# Altium PCB BCM_ECU_revA.PcbDoc (part 1 of 4)
Units mm, origin at the board's own origin, x right, y up, seen from the top; angles counter-clockwise.
Board outline 224 x 100 mm, 4 copper layers (TOP SIG, GND, PWR, BOT SIG), stack 0.603 mm thick; 389 components, 400 nets, 1315 pads, 143 vias.
Unrouted connection lines stored in the file: 689.
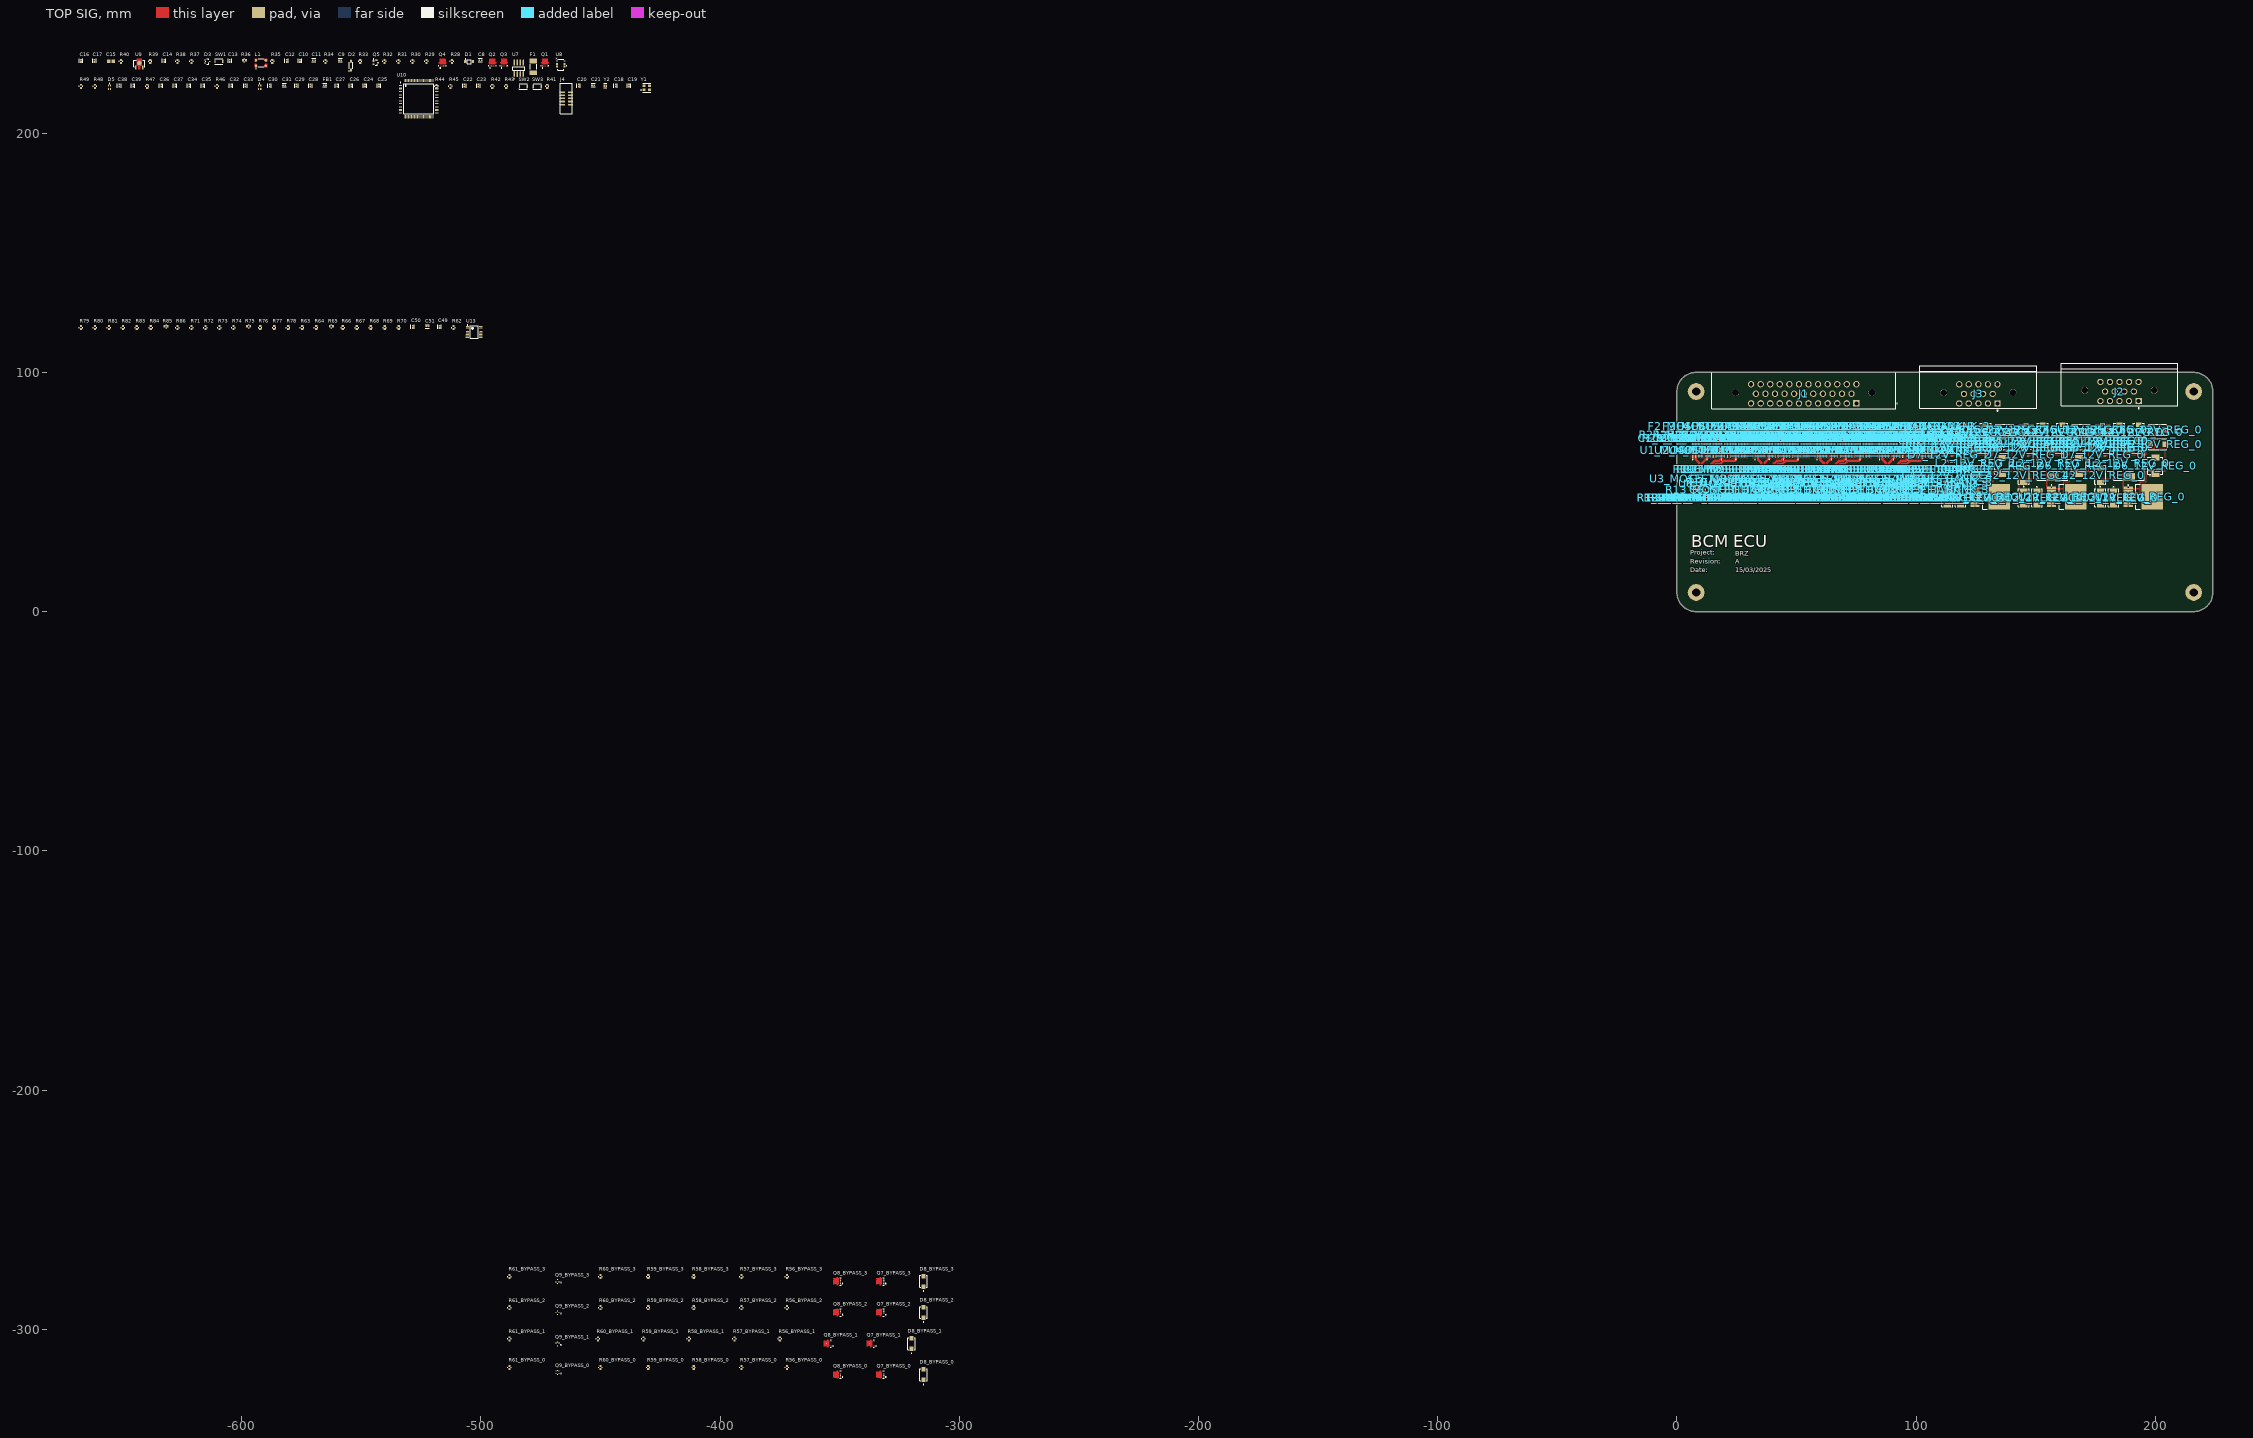
[diagram p0: TOP SIG view]
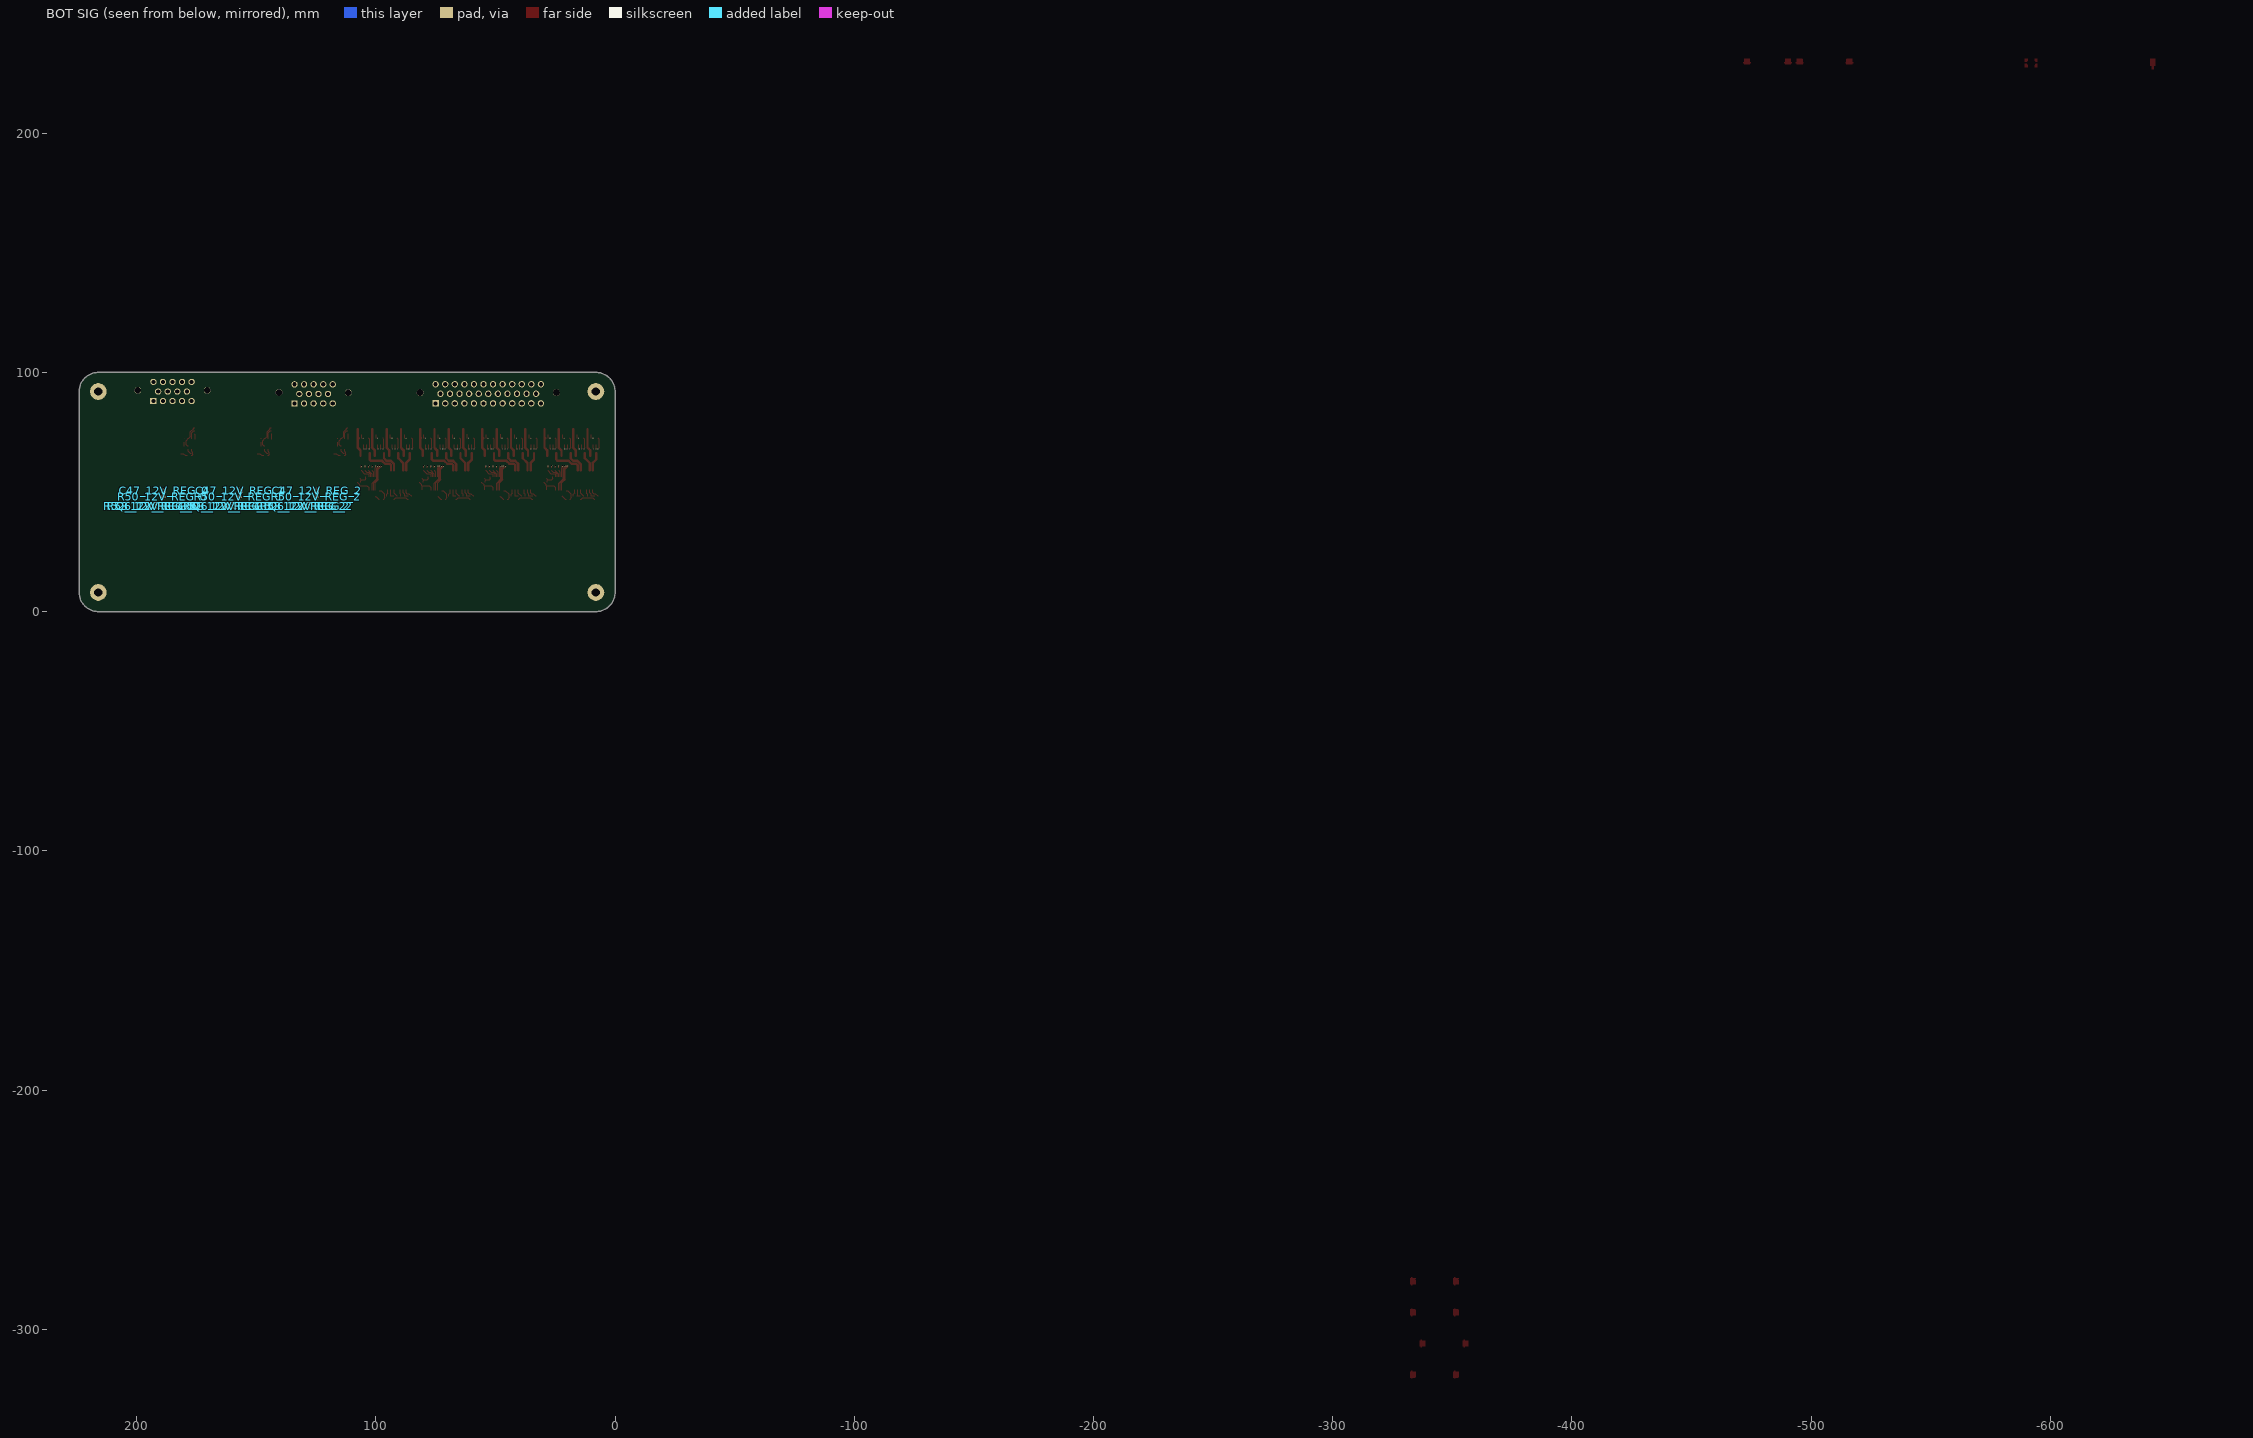
[diagram p1: BOT SIG view, seen from below]

## Layer stack, top to bottom
Top Solder: solder mask 0.0102, Solder Resist, Dk 3.5
TOP SIG: signal copper 0.0356
Dielectric 2: prepreg 0.0711, PP-006, Dk 4.1
GND: signal copper 0.035
Dielectric 1: dielectric 0.32, FR-4, Dk 4.8
PWR: signal copper 0.035
Dielectric 3: prepreg 0.0711, PP-006, Dk 4.1
BOT SIG: signal copper 0.0356
Bottom Solder: solder mask 0.0102, Solder Resist, Dk 3.5

## Board outline
0,8 ccw(c8,8) 8,0 216,0 ccw(c216,8) 224,8 224,92 ccw(c216,92) 216,100 8,100 ccw(c8,92) 0,92

## Design rules (kind name [scope] priority, off if disabled: settings)
BoardOutlineClearance [All] p1: gap=0.2 ignorepadtopadclearanceinfootprint=FALSE
Clearance [All] p1: gap=0.102 ignorepadtopadclearanceinfootprint=FALSE except(0.127: Arc-Via Track-Via SMDPad-Via THPad-Via Via-Via Via-Fill Via-Poly Via-Region Via-Text; 0.25: Arc-Hole Track-Hole SMDPad-Hole THPad-Hole Via-Hole Fill-Hole Poly-Hole Region-Hole Text-Hole)
ComponentClearance [All] p1: gap=0.102 collisioncheckmode=3 verticalgap=0.102 showdistances=TRUE
DiffPairsRouting [All] p1: maxlimit=0.102 minlimit=0.102 mostfreqgap=0.102 toplayer_minwidth=0.102 toplayer_maxwidth=1816.048 toplayer_prefwidth=0.102 midlayer1_minwidth=0.102 midlayer1_maxwidth=1816.048 midlayer1_prefwidth=0.102 midlayer2_minwidth=0.102 midlayer2_maxwidth=1816.048 midlayer2_prefwidth=0.102 bottomlayer_minwidth=0.102 bottomlayer_maxwidth=1816.048 bottomlayer_prefwidth=0.102 maxuncoupledlength=12.7
Height [All] p1: minheight=0 maxheight=1816.048 prefheight=12.7
HoleSize [All] p1: absolutevalues=TRUE maxlimit=6.3 minlimit=0.2 maxpercent=80.000 minpercent=20.000
HoleToHoleClearance [All] p1: gap=0.25 allowstackedmicrovias=FALSE
MinimumAnnularRing [All] p1: minimumring=0.076
MinimumSolderMaskSliver [All] p1: minsoldermaskwidth=0
PlaneClearance [All] p1: clearance=0.102
PlaneConnect PlaneConnectPowerPads [InPadClass('PowerPads')] p1: planeconnectstyle=Direct reliefexpansion=0.508 reliefentries=4 reliefconductorwidth=0.254 reliefairgap=0.254
PlaneConnect [All] p2: pad.planeconnectstyle=Relief pad.reliefexpansion=0.3 pad.reliefentries=4 pad.reliefconductorwidth=0.102 pad.reliefairgap=0.102 via.planeconnectstyle=Direct via.reliefexpansion=0.3 via.reliefentries=4 via.reliefconductorwidth=0.127 via.reliefairgap=0.127
PolygonConnect PolygonConnectPowerPads [All vs (InPadClass('PowerPads'))] p1: connectstyle=Direct reliefconductorwidth=0.254 reliefentries=4 polygonreliefangle="90 Angle" airgapwidth=0.254
PolygonConnect [All] p2: thpad.connectstyle=Relief thpad.reliefconductorwidth=0.102 thpad.reliefentries=4 thpad.polygonreliefangle="90 Angle" thpad.airgapwidth=0.102 smdpad.connectstyle=Relief smdpad.reliefconductorwidth=0.102 smdpad.reliefentries=4 smdpad.polygonreliefangle="90 Angle" smdpad.airgapwidth=0.102 via.connectstyle=Direct via.reliefconductorwidth=0.127 via.reliefentries=4 via.polygonreliefangle="90 Angle" via.airgapwidth=0.127
RoomDefinition 12V_REG_1 [InComponentClass('12V_REG_1')] p1: confinementstyle=ConfineIn formatcopy=TRUE lockcomponents=FALSE outline 174,80 142,80 142,42 174,42
RoomDefinition 12V_REG_2 [InComponentClass('12V_REG_2')] p2: confinementstyle=ConfineIn formatcopy=TRUE lockcomponents=FALSE outline 142,80 110,80 110,42 142,42
RoomDefinition MOSFET_BANK_3 [InComponentClass('MOSFET_BANK_3')] p3: confinementstyle=ConfineIn formatcopy=TRUE lockcomponents=FALSE outline 83,46 109,46 109,80 83,80
RoomDefinition MOSFET_BANK_2 [InComponentClass('MOSFET_BANK_2')] p4: confinementstyle=ConfineIn formatcopy=TRUE lockcomponents=FALSE outline 57,46 83,46 83,80 57,80
RoomDefinition MOSFET_BANK_1 [InComponentClass('MOSFET_BANK_1')] p5: confinementstyle=ConfineIn formatcopy=TRUE lockcomponents=FALSE outline 31,46 57,46 57,80 31,80
RoomDefinition MOSFET_BANK_0 [InComponentClass('MOSFET_BANK_0')] p6: confinementstyle=ConfineIn formatcopy=TRUE lockcomponents=FALSE outline 5,46 31,46 31,80 5,80
RoomDefinition BYPASS_3 [InComponentClass('BYPASS_3')] p7: confinementstyle=ConfineIn formatcopy=TRUE lockcomponents=FALSE outline -581,-327 -553,-327 -553,-312 -581,-312
RoomDefinition BYPASS_2 [InComponentClass('BYPASS_2')] p8: confinementstyle=ConfineIn formatcopy=TRUE lockcomponents=FALSE outline -668,-304 -648,-304 -648,-284 -668,-284
RoomDefinition BYPASS_1 [InComponentClass('BYPASS_1')] p9: confinementstyle=ConfineIn formatcopy=TRUE lockcomponents=FALSE outline -656,-321 -623,-321 -623,-310 -656,-310
RoomDefinition BYPASS_0 [InComponentClass('BYPASS_0')] p10: confinementstyle=ConfineIn formatcopy=TRUE lockcomponents=FALSE outline -605,-336 -591,-336 -591,-327 -605,-327
RoomDefinition 12V_REG_0 [InComponentClass('12V_REG_0')] p11: confinementstyle=ConfineIn formatcopy=TRUE lockcomponents=FALSE outline 206,80 174,80 174,42 206,42
RoutingVias [All] p1: holewidth=0.2 width=0.45 viastyle="Through Hole" minholewidth=0.2 minwidth=0.45 maxholewidth=6.3 maxwidth=6.55
SilkToSilkClearance [All] p1: silktosilkclearance=0
SilkToSolderMaskClearance [IsPad] p1: minsilkscreentomaskgap=0.102 clearancetoexposedcopper=TRUE
SolderMaskExpansion [All] p1: expansion=0.075 istentingtop=FALSE
Width [All] p1: maxlimit=1816.048 minlimit=0.102 preferedwidth=0.102
20 further rules are at their usual default settings.

## Classes and differential pairs
component class 12V_REG_2: C40_12V_REG_2 C41_12V_REG_2 C42_12V_REG_2 C43_12V_REG_2 C44_12V_REG_2 C45_12V_REG_2 C46_12V_REG_2 C47_12V_REG_2 C48_12V_REG_2 D6_12V_REG_2 D7_12V_REG_2 L2_12V_REG_2 Q6_12V_REG_2 R5_12V_REG_2 R7_12V_REG_2 R50_12V_REG_2 R51_12V_REG_2 R52_12V_REG_2 R53_12V_REG_2 R54_12V_REG_2 R55_12V_REG_2 R87_12V_REG_2 U11_12V_REG_2 U12_12V_REG_2
channel class MOSFET_BANK: MOSFET_BANK_0 MOSFET_BANK_1 MOSFET_BANK_2 MOSFET_BANK_3
channel class BYPASS_BLOCK: BYPASS_0 BYPASS_1 BYPASS_2 BYPASS_3
channel class 12V_REG: 12V_REG_0 12V_REG_1 12V_REG_2
net class 120DIFF: CAN_N CAN_P PRE_CAN_N PRE_CAN_P TERM_CAP
component class PWR_MGMT: C8 C9 C10 C11 C12 C13 C14 C15 C16 C17 D1 D2 D3 F1 L1 Q1 Q2 Q3 Q4 Q5 Q6 Q7 R28 R29 R30 R31 R32 R33 R34 R35 R36 R37 R38 R39 R40 SW1 U7 U8 U9
component class MOSFET_BANK_3: C1_MOSFET_BANK_3 C2_MOSFET_BANK_3 C3_MOSFET_BANK_3 C4_MOSFET_BANK_3 C5_MOSFET_BANK_3 C6_MOSFET_BANK_3 C7_MOSFET_BANK_3 F2_MOSFET_BANK_3 F3_MOSFET_BANK_3 F4_MOSFET_BANK_3 F5_MOSFET_BANK_3 R1_MOSFET_BANK_3 R2_MOSFET_BANK_3 R3_MOSFET_BANK_3 R4_MOSFET_BANK_3 R6_MOSFET_BANK_3 R8_MOSFET_BANK_3 R9_MOSFET_BANK_3 R10_MOSFET_BANK_3 R11_MOSFET_BANK_3 R12_MOSFET_BANK_3 R13_MOSFET_BANK_3 R14_MOSFET_BANK_3 R15_MOSFET_BANK_3 R16_MOSFET_BANK_3 R17_MOSFET_BANK_3 R18_MOSFET_BANK_3 R19_MOSFET_BANK_3 R20_MOSFET_BANK_3 R21_MOSFET_BANK_3 R22_MOSFET_BANK_3 R23_MOSFET_BANK_3 R24_MOSFET_BANK_3 R25_MOSFET_BANK_3 R26_MOSFET_BANK_3 R27_MOSFET_BANK_3 U1_MOSFET_BANK_3 U2_MOSFET_BANK_3 U3_MOSFET_BANK_3 U4_MOSFET_BANK_3 U5_MOSFET_BANK_3 U6_MOSFET_BANK_3
component class MOSFET_BANK_2: C1_MOSFET_BANK_2 C2_MOSFET_BANK_2 C3_MOSFET_BANK_2 C4_MOSFET_BANK_2 C5_MOSFET_BANK_2 C6_MOSFET_BANK_2 C7_MOSFET_BANK_2 F2_MOSFET_BANK_2 F3_MOSFET_BANK_2 F4_MOSFET_BANK_2 F5_MOSFET_BANK_2 R1_MOSFET_BANK_2 R2_MOSFET_BANK_2 R3_MOSFET_BANK_2 R4_MOSFET_BANK_2 R6_MOSFET_BANK_2 R8_MOSFET_BANK_2 R9_MOSFET_BANK_2 R10_MOSFET_BANK_2 R11_MOSFET_BANK_2 R12_MOSFET_BANK_2 R13_MOSFET_BANK_2 R14_MOSFET_BANK_2 R15_MOSFET_BANK_2 R16_MOSFET_BANK_2 R17_MOSFET_BANK_2 R18_MOSFET_BANK_2 R19_MOSFET_BANK_2 R20_MOSFET_BANK_2 R21_MOSFET_BANK_2 R22_MOSFET_BANK_2 R23_MOSFET_BANK_2 R24_MOSFET_BANK_2 R25_MOSFET_BANK_2 R26_MOSFET_BANK_2 R27_MOSFET_BANK_2 U1_MOSFET_BANK_2 U2_MOSFET_BANK_2 U3_MOSFET_BANK_2 U4_MOSFET_BANK_2 U5_MOSFET_BANK_2 U6_MOSFET_BANK_2
component class MOSFET_BANK_1: C1_MOSFET_BANK_1 C2_MOSFET_BANK_1 C3_MOSFET_BANK_1 C4_MOSFET_BANK_1 C5_MOSFET_BANK_1 C6_MOSFET_BANK_1 C7_MOSFET_BANK_1 F2_MOSFET_BANK_1 F3_MOSFET_BANK_1 F4_MOSFET_BANK_1 F5_MOSFET_BANK_1 R1_MOSFET_BANK_1 R2_MOSFET_BANK_1 R3_MOSFET_BANK_1 R4_MOSFET_BANK_1 R6_MOSFET_BANK_1 R8_MOSFET_BANK_1 R9_MOSFET_BANK_1 R10_MOSFET_BANK_1 R11_MOSFET_BANK_1 R12_MOSFET_BANK_1 R13_MOSFET_BANK_1 R14_MOSFET_BANK_1 R15_MOSFET_BANK_1 R16_MOSFET_BANK_1 R17_MOSFET_BANK_1 R18_MOSFET_BANK_1 R19_MOSFET_BANK_1 R20_MOSFET_BANK_1 R21_MOSFET_BANK_1 R22_MOSFET_BANK_1 R23_MOSFET_BANK_1 R24_MOSFET_BANK_1 R25_MOSFET_BANK_1 R26_MOSFET_BANK_1 R27_MOSFET_BANK_1 U1_MOSFET_BANK_1 U2_MOSFET_BANK_1 U3_MOSFET_BANK_1 U4_MOSFET_BANK_1 U5_MOSFET_BANK_1 U6_MOSFET_BANK_1
component class MOSFET_BANK_0: C1_MOSFET_BANK_0 C2_MOSFET_BANK_0 C3_MOSFET_BANK_0 C4_MOSFET_BANK_0 C5_MOSFET_BANK_0 C6_MOSFET_BANK_0 C7_MOSFET_BANK_0 F2_MOSFET_BANK_0 F3_MOSFET_BANK_0 F4_MOSFET_BANK_0 F5_MOSFET_BANK_0 R1_MOSFET_BANK_0 R2_MOSFET_BANK_0 R3_MOSFET_BANK_0 R4_MOSFET_BANK_0 R6_MOSFET_BANK_0 R8_MOSFET_BANK_0 R9_MOSFET_BANK_0 R10_MOSFET_BANK_0 R11_MOSFET_BANK_0 R12_MOSFET_BANK_0 R13_MOSFET_BANK_0 R14_MOSFET_BANK_0 R15_MOSFET_BANK_0 R16_MOSFET_BANK_0 R17_MOSFET_BANK_0 R18_MOSFET_BANK_0 R19_MOSFET_BANK_0 R20_MOSFET_BANK_0 R21_MOSFET_BANK_0 R22_MOSFET_BANK_0 R23_MOSFET_BANK_0 R24_MOSFET_BANK_0 R25_MOSFET_BANK_0 R26_MOSFET_BANK_0 R27_MOSFET_BANK_0 U1_MOSFET_BANK_0 U2_MOSFET_BANK_0 U3_MOSFET_BANK_0 U4_MOSFET_BANK_0 U5_MOSFET_BANK_0 U6_MOSFET_BANK_0
component class MCU_0: C18 C19 C20 C21 C22 C23 C24 C25 C26 C27 C28 C29 C30 C31 C32 C33 C34 C35 C36 C37 C38 C39 D4 D5 FB1 J4 R41 R42 R43 R44 R45 R46 R47 R48 R49 SW2 SW3 U10 Y1 Y2
component class BCM_ECU: J1 J2 J3
component class BYPASS_3: D8_BYPASS_3 Q7_BYPASS_3 Q8_BYPASS_3 Q9_BYPASS_3 R56_BYPASS_3 R57_BYPASS_3 R58_BYPASS_3 R59_BYPASS_3 R60_BYPASS_3 R61_BYPASS_3
component class BYPASS_2: D8_BYPASS_2 Q7_BYPASS_2 Q8_BYPASS_2 Q9_BYPASS_2 R56_BYPASS_2 R57_BYPASS_2 R58_BYPASS_2 R59_BYPASS_2 R60_BYPASS_2 R61_BYPASS_2
component class BYPASS_1: D8_BYPASS_1 Q7_BYPASS_1 Q8_BYPASS_1 Q9_BYPASS_1 R56_BYPASS_1 R57_BYPASS_1 R58_BYPASS_1 R59_BYPASS_1 R60_BYPASS_1 R61_BYPASS_1
component class BYPASS_0: D8_BYPASS_0 Q7_BYPASS_0 Q8_BYPASS_0 Q9_BYPASS_0 R56_BYPASS_0 R57_BYPASS_0 R58_BYPASS_0 R59_BYPASS_0 R60_BYPASS_0 R61_BYPASS_0
component class ADC_0: C49 C50 C51 R62 R63 R64 R65 R66 R67 R68 R69 R70 R71 R72 R73 R74 R75 R76 R77 R78 R79 R80 R81 R82 R83 R84 R85 R86 U13
component class 12V_REG_1: C40_12V_REG_1 C41_12V_REG_1 C42_12V_REG_1 C43_12V_REG_1 C44_12V_REG_1 C45_12V_REG_1 C46_12V_REG_1 C47_12V_REG_1 C48_12V_REG_1 D6_12V_REG_1 D7_12V_REG_1 G L2_12V_REG_1 Q6_12V_REG_1 R5_12V_REG_1 R7_12V_REG_1 R50_12V_REG_1 R51_12V_REG_1 R52_12V_REG_1 R53_12V_REG_1 R54_12V_REG_1 R55_12V_REG_1 R87_12V_REG_1 U11_12V_REG_1 U12_12V_REG_1
component class 12V_REG_0: C40_12V_REG_0 C41_12V_REG_0 C42_12V_REG_0 C43_12V_REG_0 C44_12V_REG_0 C45_12V_REG_0 C46_12V_REG_0 C47_12V_REG_0 C48_12V_REG_0 D6_12V_REG_0 D7_12V_REG_0 L2_12V_REG_0 Q6_12V_REG_0 R5_12V_REG_0 R7_12V_REG_0 R50_12V_REG_0 R51_12V_REG_0 R52_12V_REG_0 R53_12V_REG_0 R54_12V_REG_0 R55_12V_REG_0 R87_12V_REG_0 U11_12V_REG_0 U12_12V_REG_0
differential pair X: +X_P -X_N
differential pair X32: +X32_P -X32_N
differential pair PRE_CAN: +PRE_CAN_P -PRE_CAN_N

## Components (designator, comment, footprint, x,y, rotation, side; value= is the part's Value field where it differs from the comment)
C1_MOSFET_BANK_0 "100n" FP-0402-L_1_0_0_05-W_0_5-IPC_A 7.5,72.5 r0 top (schematic designator C1)
C1_MOSFET_BANK_1 "100n" FP-0402-L_1_0_0_05-W_0_5-IPC_A 33.5,72.5 r0 top (schematic designator C1)
C1_MOSFET_BANK_2 "100n" FP-0402-L_1_0_0_05-W_0_5-IPC_A 59.5,72.5 r0 top (schematic designator C1)
C1_MOSFET_BANK_3 "100n" FP-0402-L_1_0_0_05-W_0_5-IPC_A 85.5,72.5 r0 top (schematic designator C1)
C2_MOSFET_BANK_0 "100n" FP-0402-L_1_0_0_05-W_0_5-IPC_A 13.5,72.5 r0 top (schematic designator C2)
C2_MOSFET_BANK_1 "100n" FP-0402-L_1_0_0_05-W_0_5-IPC_A 39.5,72.5 r0 top (schematic designator C2)
C2_MOSFET_BANK_2 "100n" FP-0402-L_1_0_0_05-W_0_5-IPC_A 65.5,72.5 r0 top (schematic designator C2)
C2_MOSFET_BANK_3 "100n" FP-0402-L_1_0_0_05-W_0_5-IPC_A 91.5,72.5 r0 top (schematic designator C2)
C3_MOSFET_BANK_0 "100n" FP-0402-L_1_0_0_05-W_0_5-IPC_A 19.5,72.5 r0 top (schematic designator C3)
C3_MOSFET_BANK_1 "100n" FP-0402-L_1_0_0_05-W_0_5-IPC_A 45.5,72.5 r0 top (schematic designator C3)
C3_MOSFET_BANK_2 "100n" FP-0402-L_1_0_0_05-W_0_5-IPC_A 71.5,72.5 r0 top (schematic designator C3)
C3_MOSFET_BANK_3 "100n" FP-0402-L_1_0_0_05-W_0_5-IPC_A 97.5,72.5 r0 top (schematic designator C3)
C4_MOSFET_BANK_0 "100n" FP-0402-L_1_0_0_05-W_0_5-IPC_A 25.5,72.5 r0 top (schematic designator C4)
C4_MOSFET_BANK_1 "100n" FP-0402-L_1_0_0_05-W_0_5-IPC_A 51.5,72.5 r0 top (schematic designator C4)
C4_MOSFET_BANK_2 "100n" FP-0402-L_1_0_0_05-W_0_5-IPC_A 77.5,72.5 r0 top (schematic designator C4)
C4_MOSFET_BANK_3 "100n" FP-0402-L_1_0_0_05-W_0_5-IPC_A 103.5,72.5 r0 top (schematic designator C4)
C5_MOSFET_BANK_0 "100n" FP-0402-L_1_0_0_05-W_0_5-IPC_A 29,55.5 r0 top (schematic designator C5)
C5_MOSFET_BANK_1 "100n" FP-0402-L_1_0_0_05-W_0_5-IPC_A 55,55.5 r0 top (schematic designator C5)
C5_MOSFET_BANK_2 "100n" FP-0402-L_1_0_0_05-W_0_5-IPC_A 81,55.5 r0 top (schematic designator C5)
C5_MOSFET_BANK_3 "100n" FP-0402-L_1_0_0_05-W_0_5-IPC_A 107,55.5 r0 top (schematic designator C5)
C6_MOSFET_BANK_0 "100n" FP-0402-L_1_0_0_05-W_0_5-IPC_A 29,51 r0 top (schematic designator C6)
C6_MOSFET_BANK_1 "100n" FP-0402-L_1_0_0_05-W_0_5-IPC_A 55,51 r0 top (schematic designator C6)
C6_MOSFET_BANK_2 "100n" FP-0402-L_1_0_0_05-W_0_5-IPC_A 81,51 r0 top (schematic designator C6)
C6_MOSFET_BANK_3 "100n" FP-0402-L_1_0_0_05-W_0_5-IPC_A 107,51 r0 top (schematic designator C6)
C7_MOSFET_BANK_0 "100n" FP-0402-L_1_0_0_05-W_0_5-IPC_A 29,52.5 r0 top (schematic designator C7)
C7_MOSFET_BANK_1 "100n" FP-0402-L_1_0_0_05-W_0_5-IPC_A 55,52.5 r0 top (schematic designator C7)
C7_MOSFET_BANK_2 "100n" FP-0402-L_1_0_0_05-W_0_5-IPC_A 81,52.5 r0 top (schematic designator C7)
C7_MOSFET_BANK_3 "100n" FP-0402-L_1_0_0_05-W_0_5-IPC_A 107,52.5 r0 top (schematic designator C7)
C8 "100n" FP-0402-L_1_0_0_05-W_0_5-IPC_A -500.159,230.51 r0 top
C9 "100n" FP-0402-L_1_0_0_05-W_0_5-IPC_A -558.833,230.51 r0 top
C10 "100n" FP-0402-L_1_0_0_05-W_0_5-IPC_A -575.597,230.256 r90 top
C11 "100n" FP-0402-L_1_0_0_05-W_0_5-IPC_A -569.755,230.51 r0 top
C12 "6.6p" FP-0402-L_1_0_0_05-W_0_5-IPC_A -581.185,230.256 r90 top
C13 "100n" FP-0402-L_1_0_0_05-W_0_5-IPC_A -604.934,230.256 r90 top
C14 "6.6p" FP-0402-L_1_0_0_05-W_0_5-IPC_A -632.366,230.256 r90 top
C15 "C0805C225K9PACTU" CAPC2013X145X50ML20T25 -654.591,230.002 r0 top
C16 "100n" FP-0402-L_1_0_0_05-W_0_5-IPC_A -667.164,230.256 r90 top
C17 "100n" FP-0402-L_1_0_0_05-W_0_5-IPC_A -661.576,230.256 r90 top
C18 "6.8p" C0402B -443.644,219.842 r90 top
C19 "6.8p" C0402B -438.056,219.842 r90 top
C20 "18p" C0402B -459.138,219.842 r90 top
C21 "18p" C0402B -453.042,220.096 r0 top
C22 "100n" C0402B -506.89,219.842 r90 top
C23 "100n" C0402B -501.048,219.842 r90 top
C24 "4.7u" C0402B -548.419,219.842 r90 top
C25 "100n" C0402B -542.577,219.842 r90 top
C26 "100n" C0402B -554.261,219.842 r90 top
C27 "100n" C0402B -560.103,219.842 r90 top
C28 "100n" C0402B -571.279,219.842 r90 top
C29 "100n" C0402B -577.121,219.842 r90 top
C30 "1u" C0402B -588.297,219.842 r90 top
C31 "100n" C0402B -582.201,220.096 r0 top
C32 "2.2u" C0402B -604.426,219.842 r90 top
C33 "100n" C0402B -598.457,219.842 r90 top
C34 "2.2u" C0402B -621.952,219.842 r90 top
C35 "100n" C0402B -616.11,219.842 r90 top
C36 "1u" C0402B -633.636,219.842 r90 top
C37 "100n" C0402B -627.794,219.842 r90 top
C38 "1u" C0402B -651.162,219.842 r90 top
C39 "100n" C0402B -645.32,219.842 r90 top
C40_12V_REG_0 "TPSE686K025R0125" FP-TPSE-MFG 182.5,47.5 r90 top (schematic designator C40)
C40_12V_REG_1 "TPSE686K025R0125" FP-TPSE-MFG 150.5,47.5 r90 top (schematic designator C40)
C40_12V_REG_2 "TPSE686K025R0125" FP-TPSE-MFG 118.5,47.5 r90 top (schematic designator C40)
C41_12V_REG_0 "TPSE686K025R0125" FP-TPSE-MFG 177,47.5 r90 top (schematic designator C41)
C41_12V_REG_1 "TPSE686K025R0125" FP-TPSE-MFG 145,47.5 r90 top (schematic designator C41)
C41_12V_REG_2 "TPSE686K025R0125" FP-TPSE-MFG 113,47.5 r90 top (schematic designator C41)
C42_12V_REG_0 "TPSE686K025R0125" FP-TPSE-MFG 177,57 r270 top (schematic designator C42)
C42_12V_REG_1 "TPSE686K025R0125" FP-TPSE-MFG 145,57 r270 top (schematic designator C42)
C42_12V_REG_2 "TPSE686K025R0125" FP-TPSE-MFG 113,57 r270 top (schematic designator C42)
C43_12V_REG_0 "T495D107K016ATE125" FP-T495D107K016ATE125-MFG 185,75 r270 top (schematic designator C43)
C43_12V_REG_1 "T495D107K016ATE125" FP-T495D107K016ATE125-MFG 153,75 r270 top (schematic designator C43)
C43_12V_REG_2 "T495D107K016ATE125" FP-T495D107K016ATE125-MFG 121,75 r270 top (schematic designator C43)
C44_12V_REG_0 "T495D107K016ATE125" FP-T495D107K016ATE125-MFG 193,75 r270 top (schematic designator C44)
C44_12V_REG_1 "T495D107K016ATE125" FP-T495D107K016ATE125-MFG 161,75 r270 top (schematic designator C44)
C44_12V_REG_2 "T495D107K016ATE125" FP-T495D107K016ATE125-MFG 129,75 r270 top (schematic designator C44)
C45_12V_REG_0 "T495D107K016ATE125" FP-T495D107K016ATE125-MFG 201,76 r180 top (schematic designator C45)
C45_12V_REG_1 "T495D107K016ATE125" FP-T495D107K016ATE125-MFG 169,76 r180 top (schematic designator C45)
C45_12V_REG_2 "T495D107K016ATE125" FP-T495D107K016ATE125-MFG 137,76 r180 top (schematic designator C45)
C46_12V_REG_0 "T495D107K016ATE125" FP-T495D107K016ATE125-MFG 201,70 r180 top (schematic designator C46)
C46_12V_REG_1 "T495D107K016ATE125" FP-T495D107K016ATE125-MFG 169,70 r180 top (schematic designator C46)
C46_12V_REG_2 "T495D107K016ATE125" FP-T495D107K016ATE125-MFG 137,70 r180 top (schematic designator C46)
C47_12V_REG_0 "100n" C0402B 188.5,50.5 r270 bottom (schematic designator C47)
C47_12V_REG_1 "100n" C0402B 156.5,50.5 r270 bottom (schematic designator C47)
C47_12V_REG_2 "100n" C0402B 124.5,50.5 r270 bottom (schematic designator C47)
C48_12V_REG_0 "100n" FP-0402-L_1_0_0_05-W_0_5-IPC_A 175.5,71.5 r270 top (schematic designator C48)
C48_12V_REG_1 "100n" FP-0402-L_1_0_0_05-W_0_5-IPC_A 143.5,71.5 r270 top (schematic designator C48)
C48_12V_REG_2 "100n" FP-0402-L_1_0_0_05-W_0_5-IPC_A 111.5,71.5 r270 top (schematic designator C48)
C49 "100n" FP-0402-L_1_0_0_05-W_0_5-IPC_A -517.304,119.004 r90 top
C50 "100n" FP-0402-L_1_0_0_05-W_0_5-IPC_A -528.48,119.004 r90 top
C51 "100n" FP-0402-L_1_0_0_05-W_0_5-IPC_A -522.384,119.258 r0 top
D1 "MMSZ5242BT1G" ONSC-SOD-123-2-425-04_V -504.858,229.875 r0 top
D2 "1N4148W-TP" FP-SOD-123-IPC_A -554.261,228.224 r90 top
D3 "ESDCAN02-2BWY" FP-SOT323-3L-MFG -614.332,230.002 r0 top value=3pF
D4 "150066RG54050" WL-SBCD_0606 -592.488,219.207 r0 top
D5 "150066RG54050" WL-SBCD_0606 -655.226,219.207 r0 top
D6_12V_REG_0 "B540C-13-F" FP-SMC-MFG 200,61 r90 top value=300pF (schematic designator D6)
D6_12V_REG_1 "B540C-13-F" FP-SMC-MFG 168,61 r90 top value=300pF (schematic designator D6)
D6_12V_REG_2 "B540C-13-F" FP-SMC-MFG 136,61 r90 top value=300pF (schematic designator D6)
D7_12V_REG_0 "150066RG54050" WL-SBCD_0606 178,65.5 r90 top (schematic designator D7)
D7_12V_REG_1 "150066RG54050" WL-SBCD_0606 146,65.5 r90 top (schematic designator D7)
D7_12V_REG_2 "150066RG54050" WL-SBCD_0606 114,65.5 r90 top (schematic designator D7)
D8_BYPASS_0 "SK34A-LTP" SK34A-LTP-Footprint-1 -315,-319 r90 top (schematic designator D8)
D8_BYPASS_1 "SK34A-LTP" SK34A-LTP-Footprint-1 -320,-306 r90 top (schematic designator D8)
D8_BYPASS_2 "SK34A-LTP" SK34A-LTP-Footprint-1 -315,-293 r90 top (schematic designator D8)
D8_BYPASS_3 "SK34A-LTP" SK34A-LTP-Footprint-1 -315,-280 r90 top (schematic designator D8)
F1 "0679L9100-05" FP-0679L-MFG -478.061,227.716 r90 top value=0.0038Ω
F2_MOSFET_BANK_0 "0466003.NR" FP-0466-MFG 11.5,77.5 r90 top value=0.019Ω (schematic designator F2)
F2_MOSFET_BANK_1 "0466003.NR" FP-0466-MFG 37.5,77.5 r90 top value=0.019Ω (schematic designator F2)
F2_MOSFET_BANK_2 "0466003.NR" FP-0466-MFG 63.5,77.5 r90 top value=0.019Ω (schematic designator F2)
F2_MOSFET_BANK_3 "0466003.NR" FP-0466-MFG 89.5,77.5 r90 top value=0.019Ω (schematic designator F2)
F3_MOSFET_BANK_0 "0466003.NR" FP-0466-MFG 17.5,77.5 r90 top value=0.019Ω (schematic designator F3)
F3_MOSFET_BANK_1 "0466003.NR" FP-0466-MFG 43.5,77.5 r90 top value=0.019Ω (schematic designator F3)
F3_MOSFET_BANK_2 "0466003.NR" FP-0466-MFG 69.5,77.5 r90 top value=0.019Ω (schematic designator F3)
F3_MOSFET_BANK_3 "0466003.NR" FP-0466-MFG 95.5,77.5 r90 top value=0.019Ω (schematic designator F3)
F4_MOSFET_BANK_0 "0466003.NR" FP-0466-MFG 23.5,77.5 r90 top value=0.019Ω (schematic designator F4)
F4_MOSFET_BANK_1 "0466003.NR" FP-0466-MFG 49.5,77.5 r90 top value=0.019Ω (schematic designator F4)
F4_MOSFET_BANK_2 "0466003.NR" FP-0466-MFG 75.5,77.5 r90 top value=0.019Ω (schematic designator F4)
F4_MOSFET_BANK_3 "0466003.NR" FP-0466-MFG 101.5,77.5 r90 top value=0.019Ω (schematic designator F4)
F5_MOSFET_BANK_0 "0466003.NR" FP-0466-MFG 29.5,77.5 r90 top value=0.019Ω (schematic designator F5)
F5_MOSFET_BANK_1 "0466003.NR" FP-0466-MFG 55.5,77.5 r90 top value=0.019Ω (schematic designator F5)
F5_MOSFET_BANK_2 "0466003.NR" FP-0466-MFG 81.5,77.5 r90 top value=0.019Ω (schematic designator F5)
F5_MOSFET_BANK_3 "0466003.NR" FP-0466-MFG 107.5,77.5 r90 top value=0.019Ω (schematic designator F5)
FB1 "BLM15PX601SN1D" FP-BLM15-0_05-IPC_A -565.183,220.096 r0 top
J1 "776163-1" FP-776163-1-MFG 53,104 r180 top
J2 "1-776267-1" 1-776267-2-Footprint-1 185,92.5 r180 top
J3 "1-776267-1" 1-776267-2-Footprint-1 126,91.5 r180 top
J4 "3220-10-0300-00" 3220-10-0300-00-Footprint-1 -464.218,214.508 r0 top
L1 "SRF4532-510Y" FP-SRF4532-MFG -591.98,229.367 r0 top
L2_12V_REG_0 "SRP1265A-100M" FP-SRP1265A-100M-MFG 189,62 r90 top (schematic designator L2)
L2_12V_REG_1 "SRP1265A-100M" FP-SRP1265A-100M-MFG 157,62 r90 top (schematic designator L2)
L2_12V_REG_2 "SRP1265A-100M" FP-SRP1265A-100M-MFG 125,62 r90 top (schematic designator L2)
Q1 "SISH615ADN-T1-GE3" SISH615ADN-T1-GE3-Footprint-1 -473.235,229.494 r0 top
Q2 "SISH615ADN-T1-GE3" SISH615ADN-T1-GE3-Footprint-1 -495.206,229.494 r0 top
Q3 "SISH615ADN-T1-GE3" SISH615ADN-T1-GE3-Footprint-1 -490.38,229.494 r0 top
Q4 "SISH615ADN-T1-GE3" SISH615ADN-T1-GE3-Footprint-1 -516.034,229.494 r0 top
Q5 "BSS138W-7-F" DIOD-SOT323-3_V -543.974,229.494 r0 top
Q6_12V_REG_0 "BSS138W-7-F" DIOD-SOT323-3_V 191,44 r180 bottom (schematic designator Q6)
Q6_12V_REG_1 "BSS138W-7-F" DIOD-SOT323-3_V 159,44 r180 bottom (schematic designator Q6)
Q6_12V_REG_2 "BSS138W-7-F" DIOD-SOT323-3_V 127,44 r180 bottom (schematic designator Q6)
Q7_BYPASS_0 "SISH615ADN-T1-GE3" SISH615ADN-T1-GE3-Footprint-1 -333,-319 r90 top (schematic designator Q7)
Q7_BYPASS_1 "SISH615ADN-T1-GE3" SISH615ADN-T1-GE3-Footprint-1 -337,-306 r90 top (schematic designator Q7)
Q7_BYPASS_2 "SISH615ADN-T1-GE3" SISH615ADN-T1-GE3-Footprint-1 -333,-293 r90 top (schematic designator Q7)
Q7_BYPASS_3 "SISH615ADN-T1-GE3" SISH615ADN-T1-GE3-Footprint-1 -333,-280 r90 top (schematic designator Q7)
Q8_BYPASS_0 "SISH615ADN-T1-GE3" SISH615ADN-T1-GE3-Footprint-1 -351,-319 r90 top (schematic designator Q8)
Q8_BYPASS_1 "SISH615ADN-T1-GE3" SISH615ADN-T1-GE3-Footprint-1 -355,-306 r90 top (schematic designator Q8)
Q8_BYPASS_2 "SISH615ADN-T1-GE3" SISH615ADN-T1-GE3-Footprint-1 -351,-293 r90 top (schematic designator Q8)
Q8_BYPASS_3 "SISH615ADN-T1-GE3" SISH615ADN-T1-GE3-Footprint-1 -351,-280 r90 top (schematic designator Q8)
Q9_BYPASS_0 "SSM6L56FE,LM" FP-SON6-P-0_50-MFG -468,-318 r90 top (schematic designator Q9)
Q9_BYPASS_1 "SSM6L56FE,LM" FP-SON6-P-0_50-MFG -468,-306 r90 top (schematic designator Q9)
Q9_BYPASS_2 "SSM6L56FE,LM" FP-SON6-P-0_50-MFG -468,-293 r90 top (schematic designator Q9)
Q9_BYPASS_3 "SSM6L56FE,LM" FP-SON6-P-0_50-MFG -468,-280 r90 top (schematic designator Q9)
R1_MOSFET_BANK_0 "1k" R0603B 7,47.5 r90 top (schematic designator R1)
R1_MOSFET_BANK_1 "1k" R0603B 33,47.5 r90 top (schematic designator R1)
R1_MOSFET_BANK_2 "1k" R0603B 59,47.5 r90 top (schematic designator R1)
R1_MOSFET_BANK_3 "1k" R0603B 85,47.5 r90 top (schematic designator R1)
R2_MOSFET_BANK_0 "1k" R0603B 13,47.5 r90 top (schematic designator R2)
R2_MOSFET_BANK_1 "1k" R0603B 39,47.5 r90 top (schematic designator R2)
R2_MOSFET_BANK_2 "1k" R0603B 65,47.5 r90 top (schematic designator R2)
R2_MOSFET_BANK_3 "1k" R0603B 91,47.5 r90 top (schematic designator R2)
R3_MOSFET_BANK_0 "1k" R0603B 11.5,47.5 r90 top (schematic designator R3)
R3_MOSFET_BANK_1 "1k" R0603B 37.5,47.5 r90 top (schematic designator R3)
R3_MOSFET_BANK_2 "1k" R0603B 63.5,47.5 r90 top (schematic designator R3)
R3_MOSFET_BANK_3 "1k" R0603B 89.5,47.5 r90 top (schematic designator R3)
R4_MOSFET_BANK_0 "1k" R0603B 17.5,47.5 r90 top (schematic designator R4)
R4_MOSFET_BANK_1 "1k" R0603B 43.5,47.5 r90 top (schematic designator R4)
R4_MOSFET_BANK_2 "1k" R0603B 69.5,47.5 r90 top (schematic designator R4)
R4_MOSFET_BANK_3 "1k" R0603B 95.5,47.5 r90 top (schematic designator R4)
R5_12V_REG_0 "10k" R0603B 180,71.5 r270 top (schematic designator R5)
R5_12V_REG_1 "10k" R0603B 148,71.5 r270 top (schematic designator R5)
R5_12V_REG_2 "10k" R0603B 116,71.5 r270 top (schematic designator R5)
R6_MOSFET_BANK_0 "1k" R0603B 16,47.5 r90 top (schematic designator R6)
R6_MOSFET_BANK_1 "1k" R0603B 42,47.5 r90 top (schematic designator R6)
R6_MOSFET_BANK_2 "1k" R0603B 68,47.5 r90 top (schematic designator R6)
R6_MOSFET_BANK_3 "1k" R0603B 94,47.5 r90 top (schematic designator R6)
R7_12V_REG_0 "2.7k" R0603B 180,68.5 r270 top (schematic designator R7)
R7_12V_REG_1 "2.7k" R0603B 148,68.5 r270 top (schematic designator R7)
R7_12V_REG_2 "2.7k" R0603B 116,68.5 r270 top (schematic designator R7)
R8_MOSFET_BANK_0 "1k" R0603B 10,47.5 r90 top (schematic designator R8)
R8_MOSFET_BANK_1 "1k" R0603B 36,47.5 r90 top (schematic designator R8)
R8_MOSFET_BANK_2 "1k" R0603B 62,47.5 r90 top (schematic designator R8)
R8_MOSFET_BANK_3 "1k" R0603B 88,47.5 r90 top (schematic designator R8)
R9_MOSFET_BANK_0 "100k" R0603B 22,47.5 r270 top (schematic designator R9)
R9_MOSFET_BANK_1 "100k" R0603B 48,47.5 r270 top (schematic designator R9)
R9_MOSFET_BANK_2 "100k" R0603B 74,47.5 r270 top (schematic designator R9)
R9_MOSFET_BANK_3 "100k" R0603B 100,47.5 r270 top (schematic designator R9)
R10_MOSFET_BANK_0 "1k" R0603B 20.5,47.5 r90 top (schematic designator R10)
R10_MOSFET_BANK_1 "1k" R0603B 46.5,47.5 r90 top (schematic designator R10)
R10_MOSFET_BANK_2 "1k" R0603B 72.5,47.5 r90 top (schematic designator R10)
R10_MOSFET_BANK_3 "1k" R0603B 98.5,47.5 r90 top (schematic designator R10)
R11_MOSFET_BANK_0 "100k" R0603B 14.5,47.5 r270 top (schematic designator R11)
R11_MOSFET_BANK_1 "100k" R0603B 40.5,47.5 r270 top (schematic designator R11)
R11_MOSFET_BANK_2 "100k" R0603B 66.5,47.5 r270 top (schematic designator R11)
R11_MOSFET_BANK_3 "100k" R0603B 92.5,47.5 r270 top (schematic designator R11)
R12_MOSFET_BANK_0 "100k" R0603B 8.5,47.5 r270 top (schematic designator R12)
R12_MOSFET_BANK_1 "100k" R0603B 34.5,47.5 r270 top (schematic designator R12)
R12_MOSFET_BANK_2 "100k" R0603B 60.5,47.5 r270 top (schematic designator R12)
R12_MOSFET_BANK_3 "100k" R0603B 86.5,47.5 r270 top (schematic designator R12)
R13_MOSFET_BANK_0 "ERT-J1VR103J" RESC1608X90X30ML15T20 20.5,51 r90 top (schematic designator R13)
R13_MOSFET_BANK_1 "ERT-J1VR103J" RESC1608X90X30ML15T20 46.5,51 r90 top (schematic designator R13)
R13_MOSFET_BANK_2 "ERT-J1VR103J" RESC1608X90X30ML15T20 72.5,51 r90 top (schematic designator R13)
R13_MOSFET_BANK_3 "ERT-J1VR103J" RESC1608X90X30ML15T20 98.5,51 r90 top (schematic designator R13)
R14_MOSFET_BANK_0 "1k" R0603B 19,47.5 r90 top (schematic designator R14)
R14_MOSFET_BANK_1 "1k" R0603B 45,47.5 r90 top (schematic designator R14)
R14_MOSFET_BANK_2 "1k" R0603B 71,47.5 r90 top (schematic designator R14)
R14_MOSFET_BANK_3 "1k" R0603B 97,47.5 r90 top (schematic designator R14)
R15_MOSFET_BANK_0 "1k" R0603B 28,59.5 r90 top (schematic designator R15)
R15_MOSFET_BANK_1 "1k" R0603B 54,59.5 r90 top (schematic designator R15)
R15_MOSFET_BANK_2 "1k" R0603B 80,59.5 r90 top (schematic designator R15)
R15_MOSFET_BANK_3 "1k" R0603B 106,59.5 r90 top (schematic designator R15)
R16_MOSFET_BANK_0 "1k" R0603B 26.5,59.5 r90 top (schematic designator R16)
R16_MOSFET_BANK_1 "1k" R0603B 52.5,59.5 r90 top (schematic designator R16)
R16_MOSFET_BANK_2 "1k" R0603B 78.5,59.5 r90 top (schematic designator R16)
R16_MOSFET_BANK_3 "1k" R0603B 104.5,59.5 r90 top (schematic designator R16)
R17_MOSFET_BANK_0 "1k" R0603B 25,59.5 r90 top (schematic designator R17)
R17_MOSFET_BANK_1 "1k" R0603B 51,59.5 r90 top (schematic designator R17)
R17_MOSFET_BANK_2 "1k" R0603B 77,59.5 r90 top (schematic designator R17)
R17_MOSFET_BANK_3 "1k" R0603B 103,59.5 r90 top (schematic designator R17)
R18_MOSFET_BANK_0 "56" R0603B 29,54 r0 top (schematic designator R18)
R18_MOSFET_BANK_1 "56" R0603B 55,54 r0 top (schematic designator R18)
R18_MOSFET_BANK_2 "56" R0603B 81,54 r0 top (schematic designator R18)
R18_MOSFET_BANK_3 "56" R0603B 107,54 r0 top (schematic designator R18)
R19_MOSFET_BANK_0 "1k" R0603B 23.5,59.5 r90 top (schematic designator R19)
R19_MOSFET_BANK_1 "1k" R0603B 49.5,59.5 r90 top (schematic designator R19)
R19_MOSFET_BANK_2 "1k" R0603B 75.5,59.5 r90 top (schematic designator R19)
R19_MOSFET_BANK_3 "1k" R0603B 101.5,59.5 r90 top (schematic designator R19)
R20_MOSFET_BANK_0 "10k" R0603B 10.5,72.5 r0 top (schematic designator R20)
R20_MOSFET_BANK_1 "10k" R0603B 36.5,72.5 r0 top (schematic designator R20)
R20_MOSFET_BANK_2 "10k" R0603B 62.5,72.5 r0 top (schematic designator R20)
R20_MOSFET_BANK_3 "10k" R0603B 88.5,72.5 r0 top (schematic designator R20)
R21_MOSFET_BANK_0 "10k" R0603B 16.5,72.5 r0 top (schematic designator R21)
R21_MOSFET_BANK_1 "10k" R0603B 42.5,72.5 r0 top (schematic designator R21)
R21_MOSFET_BANK_2 "10k" R0603B 68.5,72.5 r0 top (schematic designator R21)
R21_MOSFET_BANK_3 "10k" R0603B 94.5,72.5 r0 top (schematic designator R21)
R22_MOSFET_BANK_0 "10k" R0603B 22.5,72.5 r0 top (schematic designator R22)
R22_MOSFET_BANK_1 "10k" R0603B 48.5,72.5 r0 top (schematic designator R22)
R22_MOSFET_BANK_2 "10k" R0603B 74.5,72.5 r0 top (schematic designator R22)
R22_MOSFET_BANK_3 "10k" R0603B 100.5,72.5 r0 top (schematic designator R22)
R23_MOSFET_BANK_0 "10k" R0603B 28.5,72.5 r0 top (schematic designator R23)
R23_MOSFET_BANK_1 "10k" R0603B 54.5,72.5 r0 top (schematic designator R23)
R23_MOSFET_BANK_2 "10k" R0603B 80.5,72.5 r0 top (schematic designator R23)
R23_MOSFET_BANK_3 "10k" R0603B 106.5,72.5 r0 top (schematic designator R23)
R24_MOSFET_BANK_0 "2.7k" R0603B 9.25,74 r180 top (schematic designator R24)
R24_MOSFET_BANK_1 "2.7k" R0603B 35.25,74 r180 top (schematic designator R24)
R24_MOSFET_BANK_2 "2.7k" R0603B 61.25,74 r180 top (schematic designator R24)
R24_MOSFET_BANK_3 "2.7k" R0603B 87.25,74 r180 top (schematic designator R24)
R25_MOSFET_BANK_0 "2.7k" R0603B 15.25,74 r180 top (schematic designator R25)
R25_MOSFET_BANK_1 "2.7k" R0603B 41.25,74 r180 top (schematic designator R25)
R25_MOSFET_BANK_2 "2.7k" R0603B 67.25,74 r180 top (schematic designator R25)
R25_MOSFET_BANK_3 "2.7k" R0603B 93.25,74 r180 top (schematic designator R25)
R26_MOSFET_BANK_0 "2.7k" R0603B 21.25,74 r180 top (schematic designator R26)
R26_MOSFET_BANK_1 "2.7k" R0603B 47.25,74 r180 top (schematic designator R26)
R26_MOSFET_BANK_2 "2.7k" R0603B 73.25,74 r180 top (schematic designator R26)
R26_MOSFET_BANK_3 "2.7k" R0603B 99.25,74 r180 top (schematic designator R26)
R27_MOSFET_BANK_0 "2.7k" R0603B 27.25,74 r180 top (schematic designator R27)
R27_MOSFET_BANK_1 "2.7k" R0603B 53.25,74 r180 top (schematic designator R27)
R27_MOSFET_BANK_2 "2.7k" R0603B 79.25,74 r180 top (schematic designator R27)
R27_MOSFET_BANK_3 "2.7k" R0603B 105.25,74 r180 top (schematic designator R27)
R28 "100k" R0603B -512.097,230.002 r90 top
R29 "100k" R0603B -522.765,230.002 r90 top
R30 "24k" R0603B -528.607,230.002 r90 top
R31 "100k" R0603B -534.449,230.002 r90 top
R32 "1k" R0603B -540.291,230.002 r90 top
R33 "100k" R0603B -550.451,230.002 r90 top
R34 "100k" R0603B -564.929,230.002 r90 top
R35 "1k" R0603B -587.154,230.002 r90 top
R36 "60.4" R0603B -598.838,230.51 r0 top
R37 "120" R0603B -620.936,230.002 r90 top
R38 "60.4" R0603B -626.778,230.002 r90 top
R39 "100k" R0603B -638.208,230.002 r90 top
R40 "100k" R0603B -650.4,230.002 r90 top
R41 "10k" R0603B -472.219,219.588 r90 top
R42 "330" R0603B -495.206,219.588 r90 top
R43 "330" R0603B -489.364,219.588 r90 top
R44 "10k" R0603B -518.574,219.588 r90 top
R45 "10k" R0603B -512.732,219.588 r90 top
R46 "330" R0603B -610.268,219.588 r90 top
R47 "330" R0603B -639.478,219.588 r90 top
R48 "330" R0603B -661.322,219.588 r90 top
R49 "330" R0603B -667.164,219.588 r90 top
R50_12V_REG_0 "1k" R0603B 189,48 r0 bottom (schematic designator R50)
R50_12V_REG_1 "1k" R0603B 157,48 r0 bottom (schematic designator R50)
R50_12V_REG_2 "1k" R0603B 125,48 r0 bottom (schematic designator R50)
R51_12V_REG_0 "DNP" R0603B 178.5,71.5 r90 top value=10k (schematic designator R51)
R51_12V_REG_1 "DNP" R0603B 146.5,71.5 r90 top value=10k (schematic designator R51)
R51_12V_REG_2 "DNP" R0603B 114.5,71.5 r90 top value=10k (schematic designator R51)
R52_12V_REG_0 "1k" R0603B 195,44 r90 bottom (schematic designator R52)
R52_12V_REG_1 "1k" R0603B 163,44 r90 bottom (schematic designator R52)
R52_12V_REG_2 "1k" R0603B 131,44 r90 bottom (schematic designator R52)
R53_12V_REG_0 "100k" R0603B 193.5,44 r270 bottom (schematic designator R53)
R53_12V_REG_1 "100k" R0603B 161.5,44 r270 bottom (schematic designator R53)
R53_12V_REG_2 "100k" R0603B 129.5,44 r270 bottom (schematic designator R53)
R54_12V_REG_0 "1k" R0603B 177,68.5 r270 top (schematic designator R54)
R54_12V_REG_1 "1k" R0603B 145,68.5 r270 top (schematic designator R54)
R54_12V_REG_2 "1k" R0603B 113,68.5 r270 top (schematic designator R54)
R55_12V_REG_0 "330" R0603B 178.5,68.5 r270 top (schematic designator R55)
R55_12V_REG_1 "330" R0603B 146.5,68.5 r270 top (schematic designator R55)
R55_12V_REG_2 "330" R0603B 114.5,68.5 r270 top (schematic designator R55)
R56_BYPASS_0 "100k" R0603B -372,-316 r90 top (schematic designator R56)
R56_BYPASS_1 "100k" R0603B -375,-304 r90 top (schematic designator R56)
R56_BYPASS_2 "100k" R0603B -372,-291 r90 top (schematic designator R56)
R56_BYPASS_3 "100k" R0603B -372,-278 r90 top (schematic designator R56)
R57_BYPASS_0 "1k" R0603B -391,-316 r90 top (schematic designator R57)
R57_BYPASS_1 "1k" R0603B -394,-304 r90 top (schematic designator R57)
R57_BYPASS_2 "1k" R0603B -391,-291 r90 top (schematic designator R57)
R57_BYPASS_3 "1k" R0603B -391,-278 r90 top (schematic designator R57)
R58_BYPASS_0 "1k" R0603B -411,-316 r90 top (schematic designator R58)
R58_BYPASS_1 "1k" R0603B -413,-304 r90 top (schematic designator R58)
R58_BYPASS_2 "1k" R0603B -411,-291 r90 top (schematic designator R58)
R58_BYPASS_3 "1k" R0603B -411,-278 r90 top (schematic designator R58)
R59_BYPASS_0 "100k" R0603B -430,-316 r90 top (schematic designator R59)
R59_BYPASS_1 "100k" R0603B -432,-304 r90 top (schematic designator R59)
R59_BYPASS_2 "100k" R0603B -430,-291 r90 top (schematic designator R59)
R59_BYPASS_3 "100k" R0603B -430,-278 r90 top (schematic designator R59)
R60_BYPASS_0 "1k" R0603B -450,-316 r90 top (schematic designator R60)
R60_BYPASS_1 "1k" R0603B -451,-304 r90 top (schematic designator R60)
R60_BYPASS_2 "1k" R0603B -450,-291 r90 top (schematic designator R60)
R60_BYPASS_3 "1k" R0603B -450,-278 r90 top (schematic designator R60)
R61_BYPASS_0 "100k" R0603B -488,-316 r90 top (schematic designator R61)
R61_BYPASS_1 "100k" R0603B -488,-304 r90 top (schematic designator R61)
R61_BYPASS_2 "100k" R0603B -488,-291 r90 top (schematic designator R61)
R61_BYPASS_3 "100k" R0603B -488,-278 r90 top (schematic designator R61)
R62 "56" R0603B -511.462,118.75 r90 top
R63 "100k" R0603B -574.708,118.75 r90 top
R64 "100k" R0603B -568.866,118.75 r90 top
R65 "100k" R0603B -562.516,119.258 r0 top
R66 "100k" R0603B -557.69,118.75 r90 top
R67 "100k" R0603B -551.848,118.75 r90 top
R68 "100k" R0603B -546.006,118.75 r90 top
R69 "100k" R0603B -540.164,118.75 r90 top
R70 "100k" R0603B -534.322,118.75 r90 top
R71 "100k" R0603B -620.936,118.75 r90 top
R72 "100k" R0603B -615.094,118.75 r90 top
R73 "100k" R0603B -609.252,118.75 r90 top
R74 "100k" R0603B -603.41,118.75 r90 top
R75 "100k" R0603B -597.06,119.258 r0 top
R76 "100k" R0603B -592.234,118.75 r90 top
R77 "100k" R0603B -586.392,118.75 r90 top
R78 "100k" R0603B -580.55,118.75 r90 top
R79 "24k" R0603B -667.164,118.75 r90 top
R80 "24k" R0603B -661.322,118.75 r90 top
R81 "24k" R0603B -655.48,118.75 r90 top
R82 "24k" R0603B -649.638,118.75 r90 top
R83 "24k" R0603B -643.796,118.75 r90 top
R84 "24k" R0603B -637.954,118.75 r90 top
R85 "24k" R0603B -631.604,119.258 r0 top
R86 "24k" R0603B -626.778,118.75 r90 top
R87_12V_REG_0 "1k" R0603B 177,71.5 r90 top (schematic designator R87)
R87_12V_REG_1 "1k" R0603B 145,71.5 r90 top (schematic designator R87)
R87_12V_REG_2 "1k" R0603B 113,71.5 r90 top (schematic designator R87)
SW1 "KXT331LHS" FP-KXT331LHS-MFG -609.506,230.002 r0 top
SW2 "KXT331LHS" FP-KXT331LHS-MFG -482.252,219.588 r0 top
SW3 "KXT331LHS" FP-KXT331LHS-MFG -476.41,219.588 r0 top
U1_MOSFET_BANK_0 "ACS711KLCTR-12AB-T" FP-LC-8-IPC_C 8.5,67.5 r90 top (schematic designator U1)
U1_MOSFET_BANK_1 "ACS711KLCTR-12AB-T" FP-LC-8-IPC_C 34.5,67.5 r90 top (schematic designator U1)
U1_MOSFET_BANK_2 "ACS711KLCTR-12AB-T" FP-LC-8-IPC_C 60.5,67.5 r90 top (schematic designator U1)
U1_MOSFET_BANK_3 "ACS711KLCTR-12AB-T" FP-LC-8-IPC_C 86.5,67.5 r90 top (schematic designator U1)
U2_MOSFET_BANK_0 "ACS711KLCTR-12AB-T" FP-LC-8-IPC_C 14.5,67.5 r90 top (schematic designator U2)
U2_MOSFET_BANK_1 "ACS711KLCTR-12AB-T" FP-LC-8-IPC_C 40.5,67.5 r90 top (schematic designator U2)
U2_MOSFET_BANK_2 "ACS711KLCTR-12AB-T" FP-LC-8-IPC_C 66.5,67.5 r90 top (schematic designator U2)
U2_MOSFET_BANK_3 "ACS711KLCTR-12AB-T" FP-LC-8-IPC_C 92.5,67.5 r90 top (schematic designator U2)
U3_MOSFET_BANK_0 "ITS716G" INF-PG-DSO-20-32_L 12.5,55.5 r90 top (schematic designator U3)
U3_MOSFET_BANK_1 "ITS716G" INF-PG-DSO-20-32_L 38.5,55.5 r90 top (schematic designator U3)
U3_MOSFET_BANK_2 "ITS716G" INF-PG-DSO-20-32_L 64.5,55.5 r90 top (schematic designator U3)
U3_MOSFET_BANK_3 "ITS716G" INF-PG-DSO-20-32_L 90.5,55.5 r90 top (schematic designator U3)
U4_MOSFET_BANK_0 "ACS711KLCTR-12AB-T" FP-LC-8-IPC_C 20.5,67.5 r90 top (schematic designator U4)
U4_MOSFET_BANK_1 "ACS711KLCTR-12AB-T" FP-LC-8-IPC_C 46.5,67.5 r90 top (schematic designator U4)
U4_MOSFET_BANK_2 "ACS711KLCTR-12AB-T" FP-LC-8-IPC_C 72.5,67.5 r90 top (schematic designator U4)
U4_MOSFET_BANK_3 "ACS711KLCTR-12AB-T" FP-LC-8-IPC_C 98.5,67.5 r90 top (schematic designator U4)
U5_MOSFET_BANK_0 "ACS711KLCTR-12AB-T" FP-LC-8-IPC_C 26.5,67.5 r90 top (schematic designator U5)
U5_MOSFET_BANK_1 "ACS711KLCTR-12AB-T" FP-LC-8-IPC_C 52.5,67.5 r90 top (schematic designator U5)
U5_MOSFET_BANK_2 "ACS711KLCTR-12AB-T" FP-LC-8-IPC_C 78.5,67.5 r90 top (schematic designator U5)
U5_MOSFET_BANK_3 "ACS711KLCTR-12AB-T" FP-LC-8-IPC_C 104.5,67.5 r90 top (schematic designator U5)
U6_MOSFET_BANK_0 "ADC088S022CIMT/NOPB" MTC16_L 24.5,53.5 r270 top (schematic designator U6)
U6_MOSFET_BANK_1 "ADC088S022CIMT/NOPB" MTC16_L 50.5,53.5 r270 top (schematic designator U6)
U6_MOSFET_BANK_2 "ADC088S022CIMT/NOPB" MTC16_L 76.5,53.5 r270 top (schematic designator U6)
U6_MOSFET_BANK_3 "ADC088S022CIMT/NOPB" MTC16_L 102.5,53.5 r270 top (schematic designator U6)
U7 "ACS711KLCTR-25AB-T" FP-LC-8-IPC_A -484.157,227.081 r90 top
U8 "TCAN1146DYYRQ1" TCAN1146DYYRQ1-Footprint-1 -466.612,228.629 r0 top
U9 "AP7381-50Y-13" FP-SOT89-MFG -642.78,229.113 r0 top
U10 "STM32H730VBT6" FP-LQFP100-1L-IPC_C -526,214.425 r0 top
U11_12V_REG_0 "LM2677S-12/NOPB" KTW0007B_M 195,48 r0 top (schematic designator U11)
U11_12V_REG_1 "LM2677S-12/NOPB" KTW0007B_M 163,48 r0 top (schematic designator U11)
U11_12V_REG_2 "LM2677S-12/NOPB" KTW0007B_M 131,48 r0 top (schematic designator U11)
U12_12V_REG_0 "ACS711KLCTR-12AB-T" FP-LC-8-IPC_C 178,76 r180 top (schematic designator U12)
U12_12V_REG_1 "ACS711KLCTR-12AB-T" FP-LC-8-IPC_C 146,76 r180 top (schematic designator U12)
U12_12V_REG_2 "ACS711KLCTR-12AB-T" FP-LC-8-IPC_C 114,76 r180 top (schematic designator U12)
U13 "ADC088S022CIMT/NOPB" MTC16_L -502.826,116.845 r0 top
Y1 "ABM8-48.000MHZ-B2-T" FP-ABM8-MFG -430.69,218.953 r0 top
Y2 "ECS-.327-12.5-1210-TR" FP-ECX-1210-MFG -447.962,219.842 r0 top

## Footprints (in the part's own frame and the unit in brackets; to place one, negate y for a bottom-side part, rotate by r counter-clockwise, add the part's x,y. Pads: shape width x height; smd on the part's side, far side on the other; paste and mask are expansions set on the pad)
1-776267-2-Footprint-1 [mm]
  rect 2.625x2.625 hole 1.75: 1(-8,4.5)
  round 2.625 hole 1.75: 2(-4,4.5) 3(0,4.5) 4(4,4.5) 5(8,4.5) 6(-6,0.5) 7(-2,0.5) 8(2,0.5) 9(6,0.5) 10(-8,-3.5) 11(-4,-3.5) 12(0,-3.5) 13(4,-3.5) 14(8,-3.5)
  round 2.85 hole 2.85 unplated: ""(-14.5,0) ""(14.5,0)
  silkscreen extent -24.4,-11.3 24.4,7.75, body extent -24.4,-31.3 24.4,6.5, height 28.12
3220-10-0300-00-Footprint-1 [mm]
  rrect50% 2.2x0.65 smd: 1(-1.73,2.54) 2(1.73,2.54) 3(-1.73,1.27) 4(1.73,1.27) 5(-1.73,0) 6(1.73,0) 7(-1.73,-1.27) 8(1.73,-1.27) 9(-1.73,-2.54) 10(1.73,-2.54)
  silkscreen extent -2.5,-6.35 2.5,6.35, body extent -2.74,-6.39 2.76,6.31, height 5.22
C0402B [mm]
  rect 0.715x0.672 smd paste+0 mask+0: 1(-0.479,0) 2(0.479,0)
  silkscreen extent -0.84,-0.74 0.84,0.74, body extent -1.04,-0.54 1.04,0.54, height 0.25
CAPC2013X145X50ML20T25 [mm] "Chip Capacitor, 2-Leads, Body 2.00x1.25mm, IPC Low Density"
  rect 1.5x1.55 smd: 1(-0.9,0) 2(0.9,0)
  body extent -1.1,-0.72 1.1,0.72, height 1.45
DIOD-SOT323-3_V [mm] "SOT323, 3-Leads, Body 2.2x1.35mm, Pitch 0.65mm"
  rect 0.9x0.7 smd: 1(-0.95,0.65) 2(-0.95,-0.65) 3(0.95,0)
  silkscreen extent -1.07,-1.1 0.67,1.67, body extent -1.1,-1.1 1.1,1.1, height 1.07
FP-0402-L_1_0_0_05-W_0_5-IPC_A [mm]
  rect 0.715x0.672 smd paste+0 mask+0: 1(-0.479,0) 2(0.479,0)
  silkscreen extent -0.84,-0.74 0.84,0.74, body extent -1.04,-0.54 1.04,0.54, height 0.25
FP-0466-MFG [mil]
  rect 45x80 smd paste+0 mask+0: 1(-52.5,0) 2(52.5,0)
  silkscreen extent -15,-32 15,32, body extent -79,-44 79,44, height 10
FP-0679L-MFG [mm]
  rect 1.96x3.15 smd paste+0 mask+0: 1(-2.455,0) 2(2.455,0)
  silkscreen extent -1.1,-1.4 1.1,1.4, body extent -3.53,-1.68 3.53,1.68, height 0.25
FP-776163-1-MFG [mm]
  rect 2.65x2.65 hole 1.75 paste-2539.97 mask+0: 1(-22,16.95)
  round 2.65 hole 1.75 paste-2539.97 mask+0: 2(-18,16.95) 3(-14,16.95) 4(-10,16.95) 5(-6,16.95) 6(-2,16.95) 7(2,16.95) 8(6,16.95) 9(10,16.95) 10(14,16.95) 11(18,16.95) 12(22,16.95) 13(-20,12.95) 14(-16,12.95) 15(-12,12.95) 16(-8,12.95) 17(-4,12.95) 18(0,12.95) 19(4,12.95) 20(8,12.95) 21(12,12.95) 22(16,12.95) 23(20,12.95) 24(-22,8.95) 25(-18,8.95) 26(-14,8.95) 27(-10,8.95) 28(-6,8.95) 29(-2,8.95) 30(2,8.95) 31(6,8.95) 32(10,8.95) 33(14,8.95) 34(18,8.95) 35(22,8.95)
  round 2.85 hole 2.85 unplated paste-2539.97 mask+0: ""(-28.5,12.45) ""(28.5,12.45)
  silkscreen extent -39.18,4.1 38.55,19.15, body extent -38.65,-19.25 38.65,19.25, height 0.25
FP-ABM8-MFG [mm]
  rect 1.3x1.05 smd paste+0 mask+0: 1(-1.15,-0.875) 2(1.15,-0.875) 3(1.15,0.875) 4(-1.15,0.875)
  silkscreen extent -2.5,-1.88 1.7,1.88, body extent -1.9,-1.5 1.9,1.5, height 0.25
FP-BLM15-0_05-IPC_A [mm]
  rect 0.715x0.672 smd paste+0 mask+0: 1(-0.479,0) 2(0.479,0)
  silkscreen extent -0.84,-0.74 0.84,0.74, body extent -1.04,-0.54 1.04,0.54, height 0.25
FP-ECX-1210-MFG [mm]
  rect 0.575x1.14 smd paste+0 mask+0: 1(-0.413,0) 2(0.413,0)
  silkscreen extent -0.65,-0.95 0.65,0.95, body extent -0.8,-0.67 0.8,0.67, height 0.25
FP-KXT331LHS-MFG [mm]
  rect 0.55x1.5 smd paste+0 mask+0: 1(-1.625,0) 2(1.625,0)
  silkscreen extent -1.65,-1.15 1.65,1.15, body extent -2,-1.25 2,1.25, height 0.25
FP-LC-8-IPC_A [mm]
  rect 2.474x0.622 smd paste+0 mask+0: 1(-2.416,1.905)
  rrect100% 2.474x0.622 smd paste+0 mask+0: 2(-2.416,0.635) 3(-2.416,-0.635) 4(-2.416,-1.905) 5(2.416,-1.905) 6(2.416,-0.635) 7(2.416,0.635) 8(2.416,1.905)
  silkscreen extent -4.37,-2.45 0.68,2.45, body extent -4.15,-2.95 4.15,2.95, height 0.25
FP-LC-8-IPC_C [mm]
  rect 1.874x0.542 smd paste+0 mask+0: 1(-2.316,1.905)
  rrect100% 1.874x0.542 smd paste+0 mask+0: 2(-2.316,0.635) 3(-2.316,-0.635) 4(-2.316,-1.905) 5(2.316,-1.905) 6(2.316,-0.635) 7(2.316,0.635) 8(2.316,1.905)
  silkscreen extent -3.97,-2.45 0.88,2.45, body extent -3.35,-2.55 3.35,2.55, height 0.25
FP-LQFP100-1L-IPC_C [mm]
  rect 1.355x0.212 smd paste+0 mask+0: 1(-7.575,6)
  rrect100% 1.355x0.212 smd paste+0 mask+0: 2(-7.575,5.5) 3(-7.575,5) 4(-7.575,4.5) 5(-7.575,4) 6(-7.575,3.5) 7(-7.575,3) 8(-7.575,2.5) 9(-7.575,2) 10(-7.575,1.5) 11(-7.575,1) 12(-7.575,0.5) 13(-7.575,0) 14(-7.575,-0.5) 15(-7.575,-1) 16(-7.575,-1.5) 17(-7.575,-2) 18(-7.575,-2.5) 19(-7.575,-3) 20(-7.575,-3.5) 21(-7.575,-4) 22(-7.575,-4.5) 23(-7.575,-5) 24(-7.575,-5.5) 25(-7.575,-6) 51(7.575,-6) 52(7.575,-5.5) 53(7.575,-5) 54(7.575,-4.5) 55(7.575,-4) 56(7.575,-3.5) 57(7.575,-3) 58(7.575,-2.5) 59(7.575,-2) 60(7.575,-1.5) 61(7.575,-1) 62(7.575,-0.5) 63(7.575,0) 64(7.575,0.5) 65(7.575,1) 66(7.575,1.5) 67(7.575,2) 68(7.575,2.5) 69(7.575,3) 70(7.575,3.5) 71(7.575,4) 72(7.575,4.5) 73(7.575,5) 74(7.575,5.5) 75(7.575,6)
  rrect100% 0.212x1.355 smd paste+0 mask+0: 26(-6,-7.575) 27(-5.5,-7.575) 28(-5,-7.575) 29(-4.5,-7.575) 30(-4,-7.575) 31(-3.5,-7.575) 32(-3,-7.575) 33(-2.5,-7.575) 34(-2,-7.575) 35(-1.5,-7.575) 36(-1,-7.575) 37(-0.5,-7.575) 38(0,-7.575) 39(0.5,-7.575) 40(1,-7.575) 41(1.5,-7.575) 42(2,-7.575) 43(2.5,-7.575) 44(3,-7.575) 45(3.5,-7.575) 46(4,-7.575) 47(4.5,-7.575) 48(5,-7.575) 49(5.5,-7.575) 50(6,-7.575) 76(6,7.575) 77(5.5,7.575) 78(5,7.575) 79(4.5,7.575) 80(4,7.575) 81(3.5,7.575) 82(3,7.575) 83(2.5,7.575) 84(2,7.575) 85(1.5,7.575) 86(1,7.575) 87(0.5,7.575) 88(0,7.575) 89(-0.5,7.575) 90(-1,7.575) 91(-1.5,7.575) 92(-2,7.575) 93(-2.5,7.575) 94(-3,7.575) 95(-3.5,7.575) 96(-4,7.575) 97(-4.5,7.575) 98(-5,7.575) 99(-5.5,7.575) 100(-6,7.575)
  silkscreen extent -7.7,-6.25 6.25,6.83, body extent -8.35,-8.35 8.35,8.35, height 0.25
FP-SMC-MFG [mm]
  rect 2.5x3.3 smd paste+0 mask+0: 1(-3.45,0) 2(3.45,0)
  silkscreen extent -4.25,-3.11 3.55,3.11, body extent -4.8,-3.21 4.8,3.21, height 0.25
FP-SOD-123-IPC_A [mm]
  rect 1.308x0.762 smd paste+0 mask+0: 1(-1.825,0)
  rrect100% 1.308x0.762 smd paste+0 mask+0: 2(1.825,0)
  silkscreen extent -2.39,-0.8 1.35,1.01, body extent -2.98,-1.3 2.98,1.3, height 0.25
FP-SON6-P-0_50-MFG [mm]
  rect 0.3x0.45 smd paste+0 mask+0: 1(-0.5,-0.675) 2(0,-0.675) 3(0.5,-0.675) 4(0.5,0.675) 5(0,0.675) 6(-0.5,0.675)
  silkscreen extent -0.82,-1.58 0.82,0.08, body extent -0.92,-1 0.92,1, height 0.25
FP-SOT89-MFG [mm]
  rect 0.58x1.73 smd paste+0 mask+0: 1(-1.5,-1.635) 3(1.5,-1.635)
  round 1.74 smd paste+0 mask+0: 2(0,0.146)
  TOP SIG region: -0.38,-2.5 0.38,-2.5 0.38,-1 0.967,-1 0.967,2.03 -0.967,2.03 -0.967,-1 -0.38,-1 -0.38,-2.5
  silkscreen extent -2.3,-1.3 2.3,1.3, body extent -2.4,-2.6 2.4,2.13, height 0.25
FP-SOT323-3L-MFG [mm]
  rect 0.7x0.42 smd paste+0 mask+0: 1(-1,0.65) 2(-1,-0.65) 3(1,0)
  silkscreen extent -0.67,-1.1 0.67,1.1, body extent -1.45,-1.2 1.45,1.2, height 0.25
FP-SRF4532-MFG [mm]
  round 0.99 smd paste+0 mask+0: 1(-2.05,-1.25) 2(2.05,-1.25)
  round 0.97 smd paste+0 mask+0: 3(2.05,1.125) 4(-2.05,1.125)
  TOP SIG region: -2.6,0.45 -2.6,1.8 -1.5,1.8 -1.5,0.95 -1.9,0.45
  TOP SIG region: 1.5,1.8 2.6,1.8 2.6,0.45 1.9,0.45 1.5,0.95
  TOP SIG region: 1.5,-1.8 1.5,-0.95 1.9,-0.45 2.6,-0.45 2.6,-1.8
  TOP SIG region: -2.6,-1.8 -2.6,-0.45 -1.9,-0.45 -1.5,-0.95 -1.5,-1.8
  silkscreen extent -2.17,-2.47 1.12,1.7, body extent -2.7,-1.9 2.7,1.9, height 0.25
FP-SRP1265A-100M-MFG [mm]
  rect 3.1x5 smd paste+0 mask+0: 1(-5.55,0) 2(5.55,0)
  silkscreen extent -7,-6.4 7,6.4, body extent -7.2,-6.5 7.2,6.5, height 0.25
FP-T495D107K016ATE125-MFG [mm]
  rect 1.99x2.33 smd paste+0 mask+0: 1(-3.01,0) 2(3.01,0)
  silkscreen extent -3.8,-2.3 5,2.3, body extent -4.11,-2.4 4.11,2.4, height 0.25
FP-TPSE-MFG [mm]
  rect 2x3 smd paste+0 mask+0: 1(-3,0) 2(3,0)
  silkscreen extent -3.75,-2.25 4.9,2.25, body extent -4.1,-2.35 4.1,2.35, height 0.25
INF-PG-DSO-20-32_L [mm] "SOP, 20-Leads, Body 12.7x7.5mm, Pitch 1.27mm, IPC High Density"
  oval 1.95x0.6 smd: 1(-4.55,5.715) 2(-4.55,4.445) 3(-4.55,3.175) 4(-4.55,1.905) 5(-4.55,0.635) 6(-4.55,-0.635) 7(-4.55,-1.905) 8(-4.55,-3.175) 9(-4.55,-4.445) 10(-4.55,-5.715) 11(4.55,-5.715) 12(4.55,-4.445) 13(4.55,-3.175) 14(4.55,-1.905) 15(4.55,-0.635) 16(4.55,0.635) 17(4.55,1.905) 18(4.55,3.175) 19(4.55,4.445) 20(4.55,5.715)
  silkscreen extent -4.67,-6.4 3.18,6.69, body extent -3.8,-6.4 3.8,6.4, height 2.65
KTW0007B_M [mm] "DPAK, 7-Leads, Body 9.4x10.4mm, Pitch 1.27mm, IPC Low Density"
  rrect10% 3.8x1 smd: 1(-6.35,3.81) 2(-6.35,2.54) 3(-6.35,1.27) 4(-6.35,0) 5(-6.35,-1.27) 6(-6.35,-2.54) 7(-6.35,-3.81)
  rrect1% 9.1x10.55 smd: 8(3.7,0)
  silkscreen extent -6.47,-5.2 -1.25,5.2, body extent -3.2,-5.2 6.2,5.2, height 4.65
MTC16_L [mm] "TSOP, 16-Leads, Body 5x4.4mm, Pitch 0.65mm, IPC High Density"
  oval 1.4x0.35 smd: 1(-2.8,2.275) 2(-2.8,1.625) 3(-2.8,0.975) 4(-2.8,0.325) 5(-2.8,-0.325) 6(-2.8,-0.975) 7(-2.8,-1.625) 8(-2.8,-2.275) 9(2.8,-2.275) 10(2.8,-1.625) 11(2.8,-0.975) 12(2.8,-0.325) 13(2.8,0.325) 14(2.8,0.975) 15(2.8,1.625) 16(2.8,2.275)
  silkscreen extent -2.92,-2.55 1.7,3.13, body extent -2.25,-2.55 2.25,2.55, height 1.1